# Altium PCB MainDevice.PcbDoc
Units mm, origin at the board's own origin, x right, y up, seen from the top; angles counter-clockwise.
Board outline 77.5 x 66.38 mm, 2 copper layers (Top Layer, Bottom Layer); 108 components, 71 nets, 373 pads, 239 vias.
Unrouted connection lines stored in the file: 12.
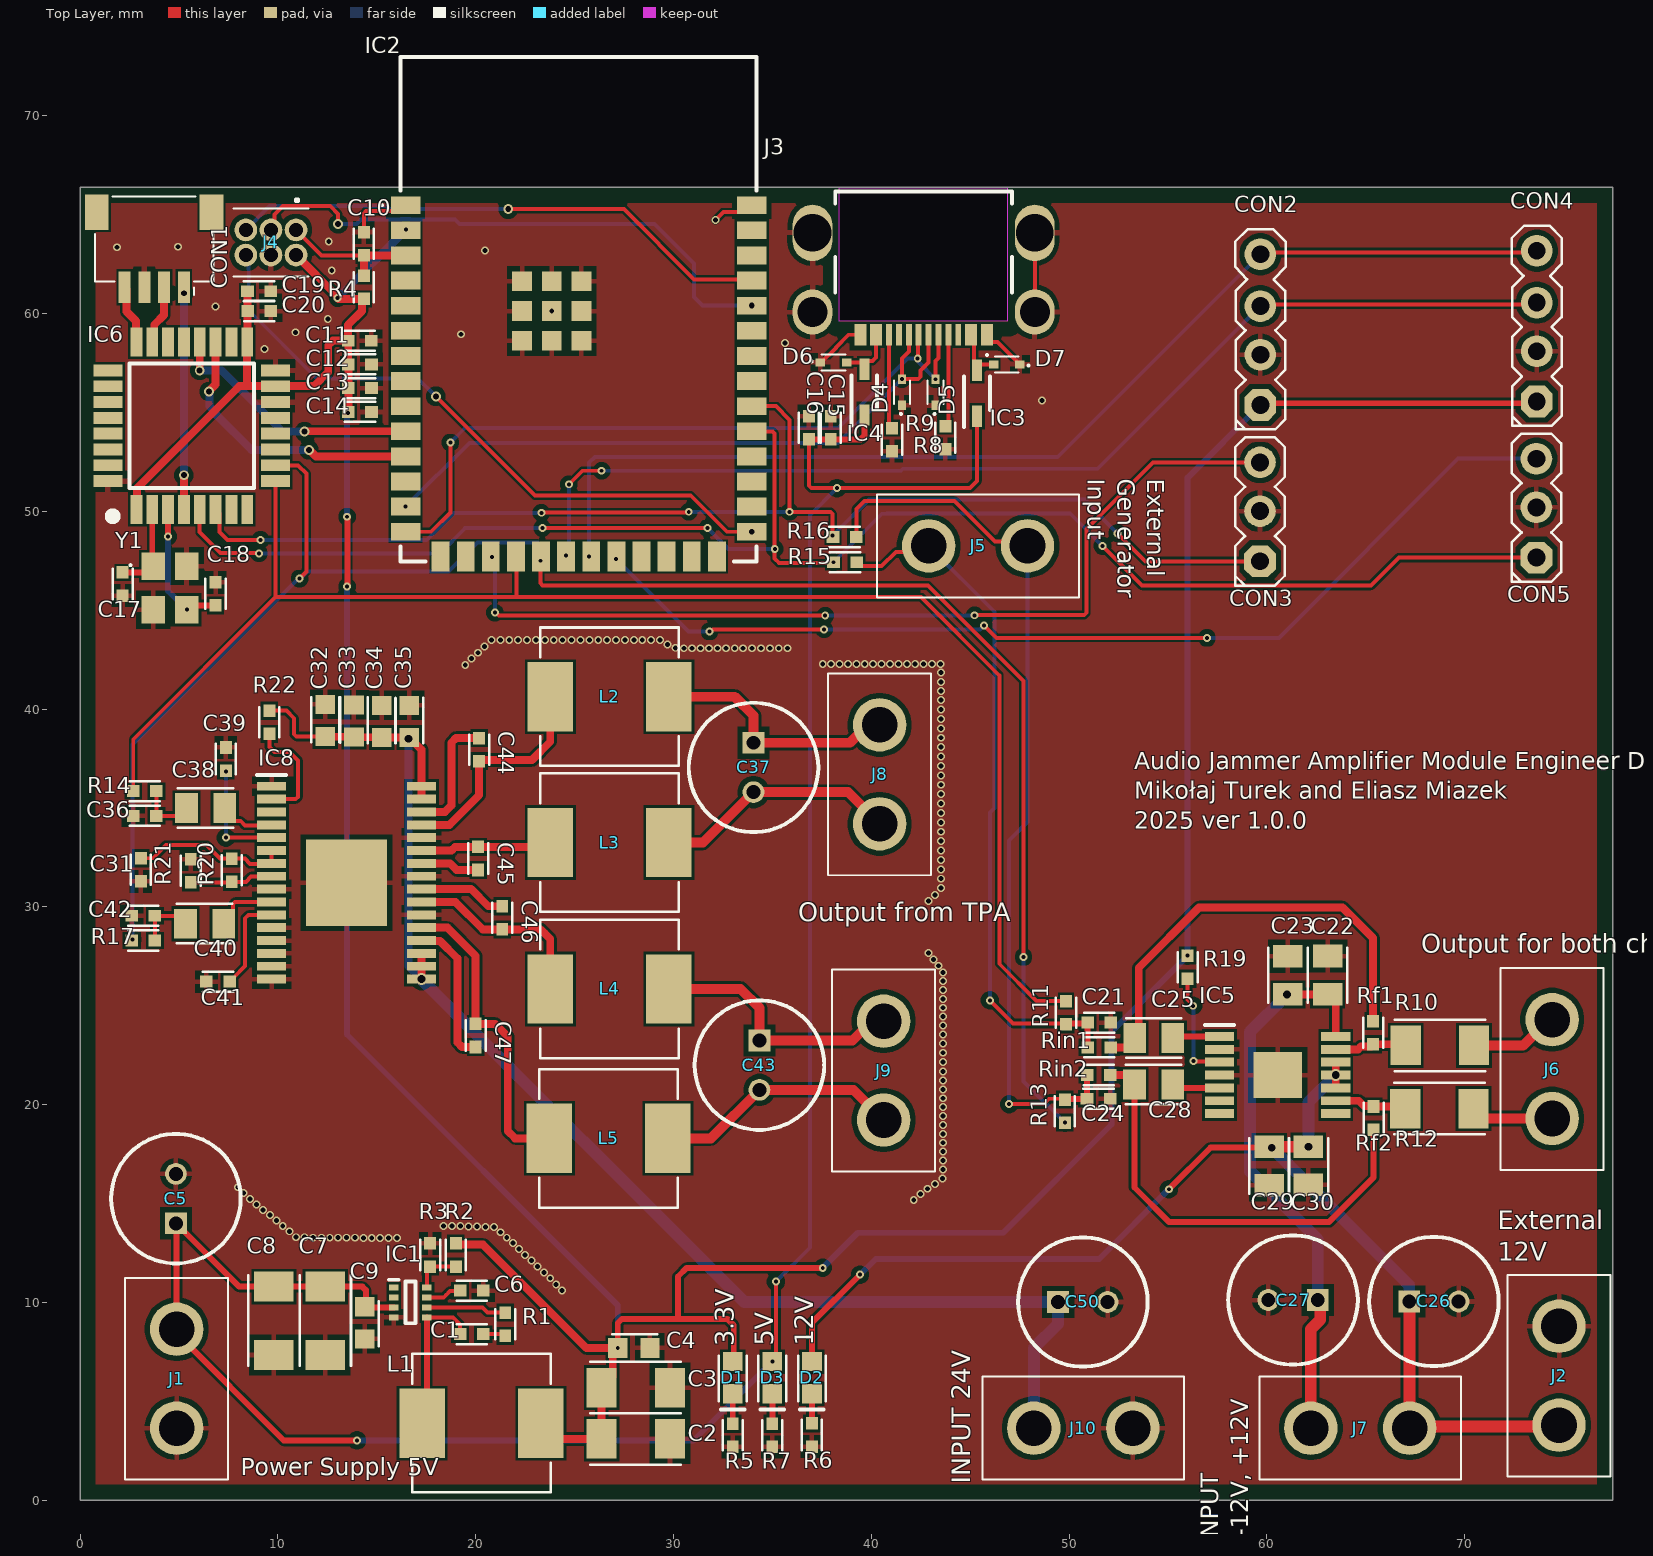
[diagram p0: Top Layer view]
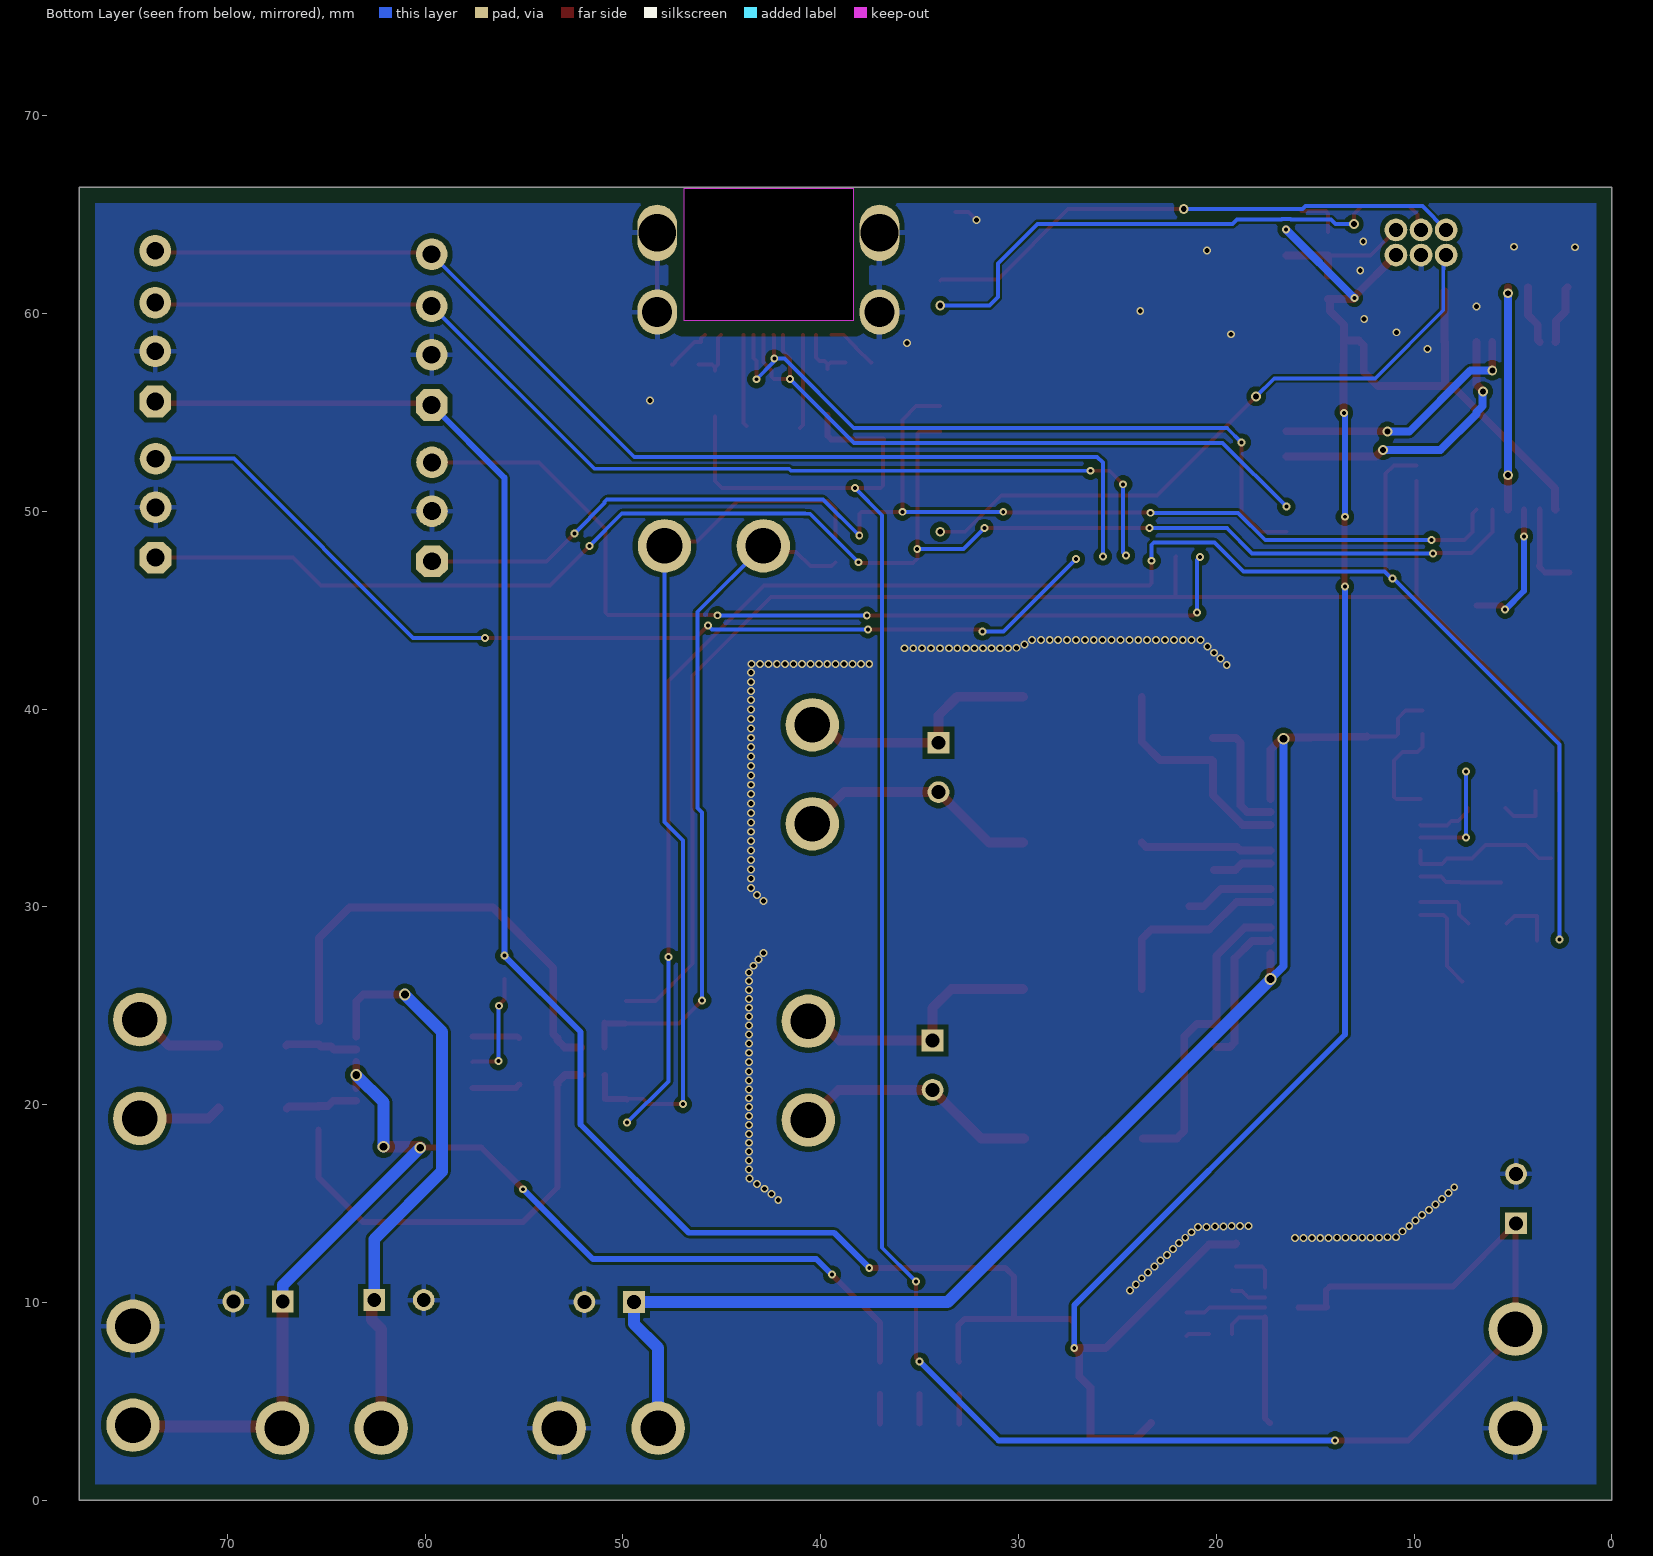
[diagram p1: Bottom Layer view, seen from below]
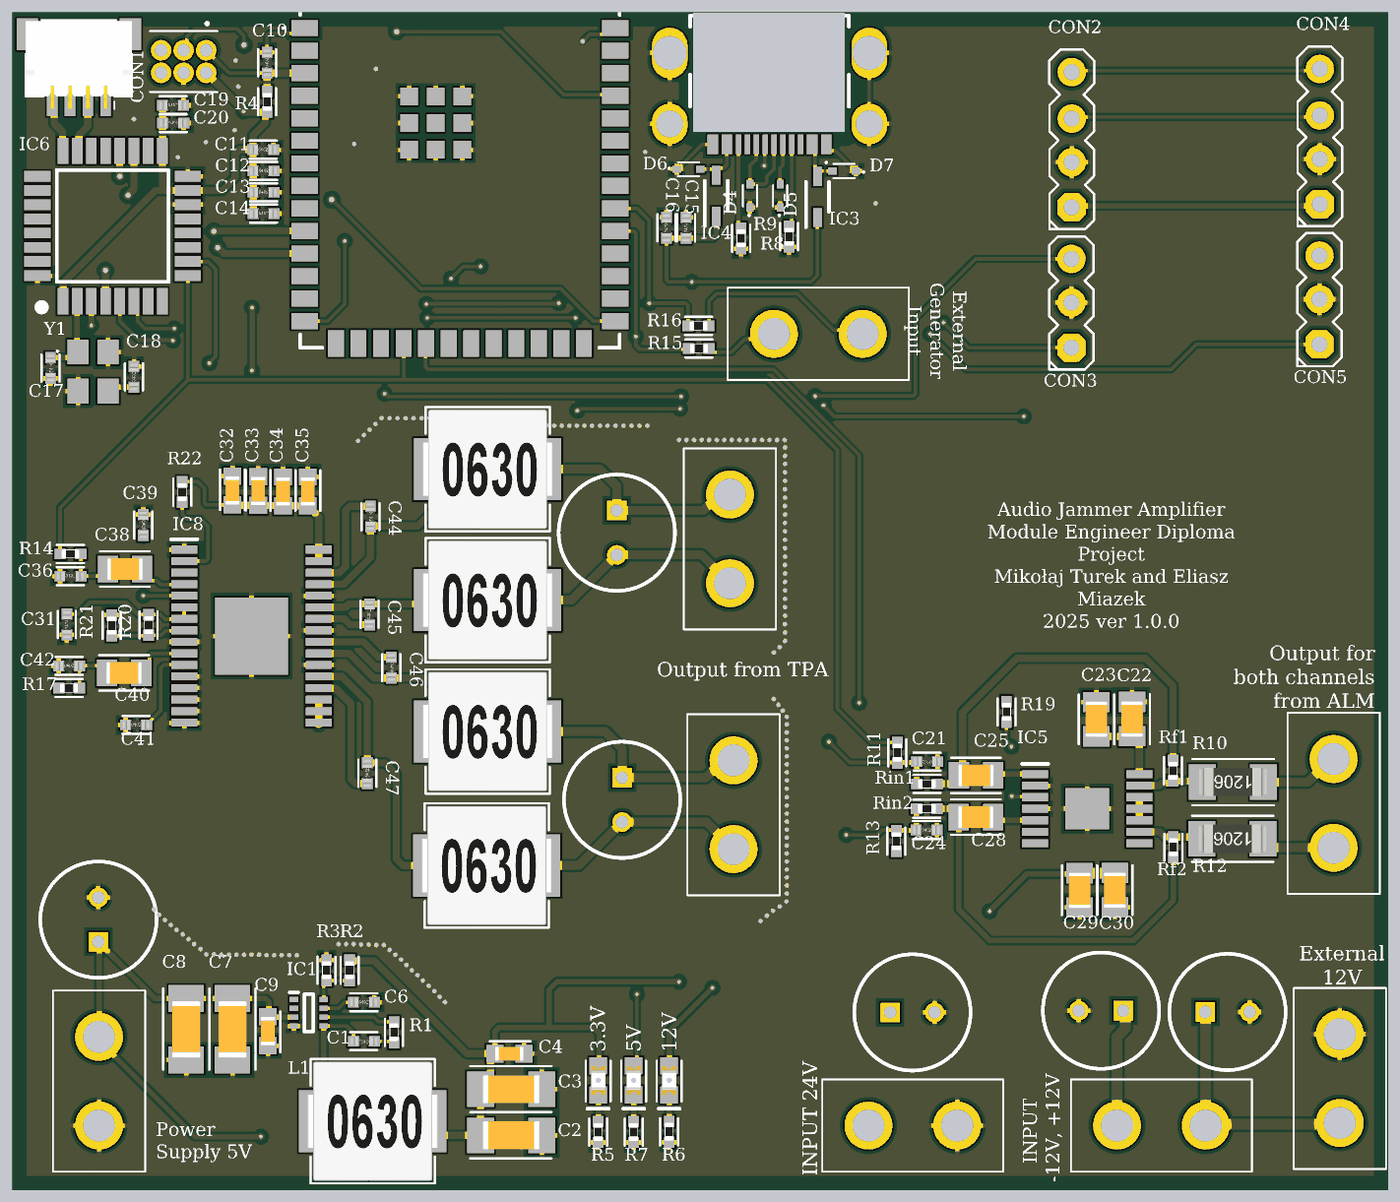
[diagram p2: 3D render of the assembled board from above, using the file's embedded part models]

## Layer stack, top to bottom
Top Solder: solder mask 0.0102, Solder Resist, Dk 3.5
Top Layer: signal copper 0.0356
Dielectric 1: dielectric 0.32, FR-4, Dk 4.8
Bottom Layer: signal copper 0.0356
Bottom Solder: solder mask 0.0102, Solder Resist, Dk 3.5

## Board outline
0,0 77.5,0 77.5,66.375 0,66.375
cut-out: 38.352,66.325 38.352,59.625 46.902,59.625 46.902,66.325

## Design rules (kind name [scope] priority, off if disabled: settings)
BoardOutlineClearance [All] p1: gap=0.8 ignorepadtopadclearanceinfootprint=FALSE
Clearance [All] p1: gap=0.127 ignorepadtopadclearanceinfootprint=TRUE except(0.2: Arc-THPad Track-THPad SMDPad-THPad; 0.254: THPad-Fill THPad-Poly THPad-Region Via-Fill Via-Poly Via-Region; 0.33: Arc-Hole Track-Hole SMDPad-Hole THPad-Hole Via-Hole Fill-Hole Poly-Hole Region-Hole; 0.5: THPad-THPad)
HoleSize [All] p1: absolutevalues=TRUE maxlimit=4 minlimit=0.02 maxpercent=80.000 minpercent=20.000
HoleToHoleClearance [All] p1: gap=0.127 allowstackedmicrovias=TRUE
PlaneClearance [All] p1: clearance=0.3
PlaneConnect PlaneConnect_1 [(HasFootprint('R 2512'))] p1: planeconnectstyle=Relief reliefexpansion=0.508 reliefentries=4 reliefconductorwidth=0.254 reliefairgap=0.254
PlaneConnect [All] p2: planeconnectstyle=Relief reliefexpansion=0.508 reliefentries=4 reliefconductorwidth=0.254 reliefairgap=0.254
PolygonConnect "Polygon Power Connection" [(HasFootprint('DFN 5x6')) OR  (HasFootprint('R 2512')) OR  IsVia OR  HasFootprint('SMD PAD')  OR  (HasFootprint('DJNR60454R5FERROCORE'))  OR  (HasFootprint ('SON50P200X200X80-9N-D')) OR (HasFootprint('SOT230P700X180-4N'))  OR    InNetClass('Power')] p1: connectstyle=Direct reliefconductorwidth=0.254 reliefentries=4 polygonreliefangle="90 Angle" airgapwidth=0.254 // Conection to high power components
PolygonConnect [All] p2: connectstyle=Relief reliefconductorwidth=0.254 reliefentries=4 polygonreliefangle="90 Angle" airgapwidth=0.254
RoutingVias [All] p1: holewidth=0.3 width=0.5 viastyle="Through Hole" minholewidth=0.2 minwidth=0.3 maxholewidth=1 maxwidth=1.27
SilkToSilkClearance [All] p1: silktosilkclearance=0.127
SolderMaskExpansion "Tented Vias" [IsVia] p1: expansion=0.102 istentingtop=TRUE
SolderMaskExpansion [All] p2: expansion=0.102 istentingtop=FALSE
Width [All] p1: maxlimit=1 minlimit=0.127 preferedwidth=0.3 minimp=50.000000 maximp=50.000000 favimp=50.000000
25 further rules are at their usual default settings.

## Classes and differential pairs
component class PowerSupply: C1 C2 C3 C4 C5 C6 C7 C8 C9 C26 C27 C50 IC1 J1 J2 J7 J10 L1 R1 R2 R3
component class MCU: C10 C11 C12 C13 C14 C17 C18 C19 C20 CON1 CON2 CON3 CON4 CON5 D1 D2 D3 IC2 IC6 R4 R5 R6 R7 Y1
component class Interface: C15 C16 D4 D5 D6 D7 IC3 IC4 J3 J4 R8 R9
component class Amplifiers: C21 C22 C23 C24 C25 C28 C29 C30 C31 C32 C33 C34 C35 C36 C37 C38 C39 C40 C41 C42 C43 C44 C45 C46 C47 IC5 IC8 J5 J6 J8 J9 L2 L3 L4 L5 R10 R11 R12 R13 R14 R15 R16 R17 R19 R20 R21 R22 Rf1 Rf2 Rin1 Rin2

## Components (designator, comment, footprint, x,y, rotation, side; value= is the part's Value field where it differs from the comment)
C1 "100nF" "C 0402" 19.8,8.4 r180 top
C2 "40uF" "C 1206" 28.1,3.1 r0 top
C3 "40uF" "C 1206" 28.1,5.7 r0 top
C4 "100nF" "C 0603" 28,7.7 r0 top
C5 "UVY1V101MED1TD" CAPPRD250W50D655H1250 4.85,14 r90 top
C6 "33nF" "C 0402" 19.8,10.6 r0 top
C7 "10uF" "C 1206" 12.4,9.073 r270 top
C8 "10uF" "C 1206" 9.8,9.073 r270 top
C9 "100nF" "C 0603" 14.4,8.973 r270 top
C10 "1uF" "C 0402" 14.352,63.525 r90 top
C11 "1uF" "C 0402" 14.136,58.625 r0 top
C12 "100nF" "C 0402" 14.152,57.425 r0 top
C13 "10uF" "C 0402" 14.152,56.225 r0 top
C14 "22uF" "C 0402" 14.152,55.025 r0 top
C15 "10uF" "C 0402" 37.952,54.225 r90 top
C16 "10uF" "C 0402" 36.852,54.225 r90 top
C17 "22pF" "C 0402" 2.152,46.325 r270 top
C18 "22pF" "C 0402" 6.852,45.825 r90 top
C19 "1uF" "C 0402" 9.052,61.125 r0 top
C20 "100nF" "C 0402" 9.067,60.125 r0 top
C21 "Value" "C 0402" 51.525,24.15 r180 top
C22 "10uF" "C 0805" 63.075,26.55 r90 top
C23 "100nF" "C 0805" 61.065,26.542 r90 top
C24 "Value" "C 0402" 51.493,20.3 r0 top
C25 "10uF" "C 0805" 54.285,23.375 r0 top
C26 "UVY1V101MED1TD" CAPPRD250W50D655H1250 67.2,10.05 r0 top
C27 "UVY1V101MED1TD" CAPPRD250W50D655H1250 62.575,10.125 r180 top
C28 "10uF" "C 0805" 54.275,21.025 r0 top
C29 "10uF" "C 0805" 60.125,16.9 r270 top
C30 "100nF" "C 0805" 62.1,16.915 r270 top
C31 "1uF" "C 0402" 3.075,31.875 r90 top
C32 "1uF" "C 0603" 12.4,39.425 r90 top
C33 "1uF" "C 0603" 13.85,39.4 r90 top
C34 "1uF" "C 0603" 15.25,39.375 r90 top
C35 "1uF" "C 0603" 16.65,39.375 r90 top
C36 "Value" "C 0402" 3.275,34.6 r0 top
C37 "680nF" CAPPRD250W50D655H1250 34.05,38.3 r270 top
C38 "10uF" "C 0805" 6.35,35 r0 top
C39 "10uF" "C 0402" 7.375,37.475 r270 top
C40 "10uF" "C 0805" 6.3,29.15 r0 top
C41 "10uF" "C 0402" 6.975,26.225 r0 top
C42 "Value" "C 0402" 3.2,29.55 r0 top
C43 "680nF" CAPPRD250W50D655H1250 34.35,23.25 r270 top
C44 "220nF" "C 0402" 20.175,37.95 r270 top
C45 "220nF" "C 0402" 20.125,32.45 r90 top
C46 "220nF" "C 0402" 21.35,29.45 r270 top
C47 "220nF" "C 0402" 20,23.5 r90 top
C50 "UVY1V101MED1TD" CAPPRD250W50D655H1250 49.45,10.025 r0 top
CON1 "4 PIN" SM04B-SRSS-TB 3.752,64.125 r0 top
CON2 "4 PIN" "Goldpin 2.54 4P" 59.677,59.185 r90 top
CON3 "3 Pin" "Goldpin 2.54 3P" 59.657,50.011 r90 top
CON4 "4 PIN" "Goldpin 2.54 4P" 73.652,59.36 r90 top
CON5 "3 Pin" "Goldpin 2.54 3P" 73.632,50.198 r90 top
D1 "LED BLUE" "LED 0603 BLUE" 33,6.2 r270 top
D2 "LED BLUE" "LED 0603 BLUE" 37,6.2 r270 top
D3 "LED BLUE" "LED 0603 BLUE" 35,6.2 r270 top
D4 "LESD5D5.0CT1G" LESD5D50CT1G 41.552,56.025 r90 top
D5 "LESD5D5.0CT1G" LESD5D50CT1G 43.252,56.025 r90 top
D6 "LESD5D5.0CT1G" LESD5D50CT1G 38.092,57.525 r0 top
D7 "LESD5D5.0CT1G" LESD5D50CT1G 46.852,57.425 r180 top
IC1 "TPS62933DRLR" SOTFL50P160X60-8N 16.7,10 r0 top
IC2 "ESP32-S3-WROOM-2-N32R16V" ESP32S3WROOM2N32R16V 25.212,60.215 r0 top
IC3 "BAT760-7" SOD2513X120N 45.352,55.963 r90 top
IC4 "BAT760-7" SOD2513X120N 39.652,56.025 r90 top
IC5 "ALM2403QPWPRQ1" SOP65P640X120-15N 60.55,21.5 r0 top
IC6 "STM32G431KBT6" QFP80P900X900X160-32N 5.652,54.325 r90 top
IC8 "TPA3116D2DADR" SOP65P810X120-33N 13.475,31.225 r0 top
J1 "XT30PB" XT30PB 4.885,3.65 r180 top
J2 "XT30PB" XT30PB 74.775,8.8 r0 top
J3 "USB4500-03-0-A" USB4500030A 42.652,62.925 r180 top
J4 "FTSH-103-01-F-D" FTSH-103-XX-YYY-D 10.922,64.225 r180 top
J5 "XT30PB" XT30PB 42.902,48.25 r90 top
J6 "XT30PB" XT30PB 74.425,24.3 r0 top
J7 "XT30PB" XT30PB 62.225,3.65 r90 top
J8 "XT30PB" XT30PB 40.425,39.2 r0 top
J9 "XT30PB" XT30PB 40.625,24.225 r0 top
J10 "XT30PB" XT30PB 53.225,3.65 r270 top
L1 "4.7uH" HPI0630 20.3,3.9 r0 top
L2 "4.7uH" HPI0630 26.775,40.625 r0 top
L3 "4.7uH" HPI0630 26.775,33.25 r0 top
L4 "4.7uH" HPI0630 26.775,25.85 r0 top
L5 "4.7uH" HPI0630 26.725,18.3 r0 top
R1 "0" "R 0402" 21.5,8.9 r90 top
R2 "31.3K" "R 0402" 19,12.4 r270 top
R3 "10K" "R 0402" 17.7,12.4 r270 top
R4 "10k" "R 0402" 14.352,61.325 r270 top
R5 "160" "R 0402" 33,3.284 r90 top
R6 "160" "R 0402" 37,3.3 r90 top
R7 "160" "R 0402" 35,3.284 r90 top
R8 "10k" "R 0402" 43.752,53.725 r90 top
R9 "10k" "R 0402" 41.052,53.625 r90 top
R10 "100R" "R 1206" 68.75,23 r180 top
R11 "Value" "R 0402" 49.85,24.65 r270 top
R12 "100R" "R 1206" 68.725,19.8 r180 top
R13 "Value" "R 0402" 49.793,19.675 r90 top
R14 "Value" "R 0402" 3.275,35.85 r0 top
R15 "0R" "R 0402" 38.677,47.425 r0 top
R16 "0R" "R 0402" 38.652,48.7 r0 top
R17 "Value" "R 0402" 3.2,28.3 r180 top
R19 "10k" "R 0402" 56,26.95 r270 top
R20 "100k" "R 0402" 7.674,31.852 r90 top
R21 "39k" "R 0402" 5.6,31.825 r270 top
R22 "100k" "R 0402" 9.575,39.334 r90 top
Rf1 "Value" "R 0402" 65.375,23.641 r90 top
Rf2 "Value" "R 0402" 65.4,19.325 r270 top
Rin1 "Value" "R 0402" 51.525,22.9 r0 top
Rin2 "Value" "R 0402" 51.509,21.5 r0 top
Y1 "MCSJK-7U-16.00-12-30-80-B-30" MCSJK7U1600123080B30 4.552,46.125 r270 top

## Footprints (in the part's own frame and the unit in brackets; to place one, negate y for a bottom-side part, rotate by r counter-clockwise, add the part's x,y. Pads: shape width x height; smd on the part's side, far side on the other; paste and mask are expansions set on the pad)
"C 0402" [mm] "MLCC Capacitor 0402"
  rect 0.635x0.6 smd: 1(-0.584,0) 2(0.584,0)
  silkscreen extent -0.76,-0.51 0.76,0.51, body extent -0.76,-0.25 0.74,0.25, height 0.35
"C 0603" [mil]
  rect 38x39.37 smd: 1(-32,0) 2(32,0)
  silkscreen extent -43,-28 47,28, body extent -31,-16 31,16, height 24
"C 0805" [mil]
  rect 45x59.06 smd: 1(-38,0) 2(38,0)
  silkscreen extent -55,-39 55,39, body extent -39,-25 39,25, height 49
"C 1206" [mil]
  rect 60x78.74 smd: 1(-68,0) 2(68,0)
  silkscreen extent -91,-51 89,51, body extent -63,-31 63,31, height 59
CAPPRD250W50D655H1250 [mm]
  rect 1.1x1.1 hole 0.7: 1(0,0)
  round 1.1 hole 0.7: 2(2.5,0)
  silkscreen extent -2.02,-3.27 4.52,3.27, body extent -2.15,-3.4 4.65,3.4, height 12.5
ESP32S3WROOM2N32R16V [mm]
  rect 1.5x0.9 smd: 1(-8.75,5.26) 2(-8.75,3.99) 3(-8.75,2.72) 4(-8.75,1.45) 5(-8.75,0.18) 6(-8.75,-1.09) 7(-8.75,-2.36) 8(-8.75,-3.63) 9(-8.75,-4.9) 10(-8.75,-6.17) 11(-8.75,-7.44) 12(-8.75,-8.71) 13(-8.75,-9.98) 14(-8.75,-11.25) 27(8.75,-11.25) 28(8.75,-9.98) 29(8.75,-8.71) 30(8.75,-7.44) 31(8.75,-6.17) 32(8.75,-4.9) 33(8.75,-3.63) 34(8.75,-2.36) 35(8.75,-1.09) 36(8.75,0.18) 37(8.75,1.45) 38(8.75,2.72) 39(8.75,3.99) 40(8.75,5.26)
  rect 0.9x1.5 smd: 15(-6.985,-12.5) 16(-5.715,-12.5) 17(-4.445,-12.5) 18(-3.175,-12.5) 19(-1.905,-12.5) 20(-0.635,-12.5) 21(0.635,-12.5) 22(1.905,-12.5) 23(3.175,-12.5) 24(4.445,-12.5) 25(5.715,-12.5) 26(6.985,-12.5)
  rect 1x1 smd: 41(-1.36,-0.09) 42(-2.86,1.41) 43(-2.86,-0.09) 44(-2.86,-1.59) 45(-1.36,-1.59) 46(0.14,-1.59) 47(0.14,-0.09) 48(0.14,1.41) 49(-1.36,1.41)
  silkscreen extent -10,-12.75 9,12.75, body extent -9,-12.75 9,12.75, height 3.25
FTSH-103-XX-YYY-D [mm]
  round 1.15 hole 0.71: 1(0,0) 2(0,1.27) 3(1.27,0) 4(1.27,1.27) 5(2.54,0) 6(2.54,1.27)
  silkscreen extent -0.64,-1.55 3.17,2.35, body extent -0.66,-1.03 3.15,2.39, height 5.67
"Goldpin 2.54 3P" [mm]
  oct 1.6x1.6 hole 0.9: 1(-2.54,0)
  round 1.6 hole 0.9: 2(0,0) 3(2.46,0)
  silkscreen extent -3.77,-1.25 3.73,1.25
"Goldpin 2.54 4P" [mm]
  oct 1.6x1.6 hole 0.9: 1(-3.81,0)
  round 1.6 hole 0.9: 2(-1.27,0) 3(1.19,0) 4(3.81,0)
  silkscreen extent -5.04,-1.27 5.08,1.27
HPI0630 [mm] "Power Inductor"
  rect 2.3x3.5 smd: 1(-3,0) 2(3,0)
  silkscreen extent -3.5,-3.5 3.5,3.5, body extent -3.65,-3.35 3.65,3.35, height 2.81
"LED 0603 BLUE" [mil]
  rect 38x39.37 smd: 1(-32,0) 2(32,0)
  silkscreen extent -43,-28 63,28, body extent -31,-16 31,16, height 22
LESD5D50CT1G [mm]
  rect 0.48x0.4 smd: 1(-0.66,0) 2(0.66,0)
  silkscreen extent -1.15,-0.4 0.6,0.4, body extent -0.8,-0.4 0.8,0.4, height 0.6
MCSJK7U1600123080B30 [mm]
  rect 1.4x1.2 smd: 1(-1.1,-0.85) 2(1.1,-0.85) 3(1.1,0.85) 4(-1.1,0.85)
  silkscreen extent -1.2,-2.05 -1.1,-1.95, body extent -1.68,-1.33 1.68,1.33, height 0.9
QFP80P900X900X160-32N [mm]
  rect 1.475x0.6 smd: 1(-4.238,2.8) 2(-4.238,2) 3(-4.238,1.2) 4(-4.238,0.4) 5(-4.238,-0.4) 6(-4.238,-1.2) 7(-4.238,-2) 8(-4.238,-2.8) 17(4.238,-2.8) 18(4.238,-2) 19(4.238,-1.2) 20(4.238,-0.4) 21(4.238,0.4) 22(4.238,1.2) 23(4.238,2) 24(4.238,2.8)
  rect 0.6x1.475 smd: 9(-2.8,-4.238) 10(-2,-4.238) 11(-1.2,-4.238) 12(-0.4,-4.238) 13(0.4,-4.238) 14(1.2,-4.238) 15(2,-4.238) 16(2.8,-4.238) 25(2.8,4.238) 26(2,4.238) 27(1.2,4.238) 28(0.4,4.238) 29(-0.4,4.238) 30(-1.2,4.238) 31(-2,4.238) 32(-2.8,4.238)
  silkscreen extent -4.77,-3.15 3.15,4.2, body extent -4.5,-4.5 4.5,4.5, height 1.6
"R 0402" [mm] "0402 resistor Chip"
  rect 0.635x0.6 smd: 1(-0.584,0) 2(0.584,0)
  silkscreen extent -0.76,-0.51 0.76,0.51, body extent -0.5,-0.25 0.5,0.25, height 0.31
"R 1206" [mil]
  rect 60x78.74 smd: 1(-68,0) 2(68,0)
  silkscreen extent -91,-51 89,51, body extent -75,-32 75,31, height 24
SM04B-SRSS-TB [mm]
  rect 0.6x1.6 smd: 1(1.5,-2.8) 2(0.5,-2.8) 3(-0.5,-2.8) 4(-1.5,-2.8)
  rect 1.2x1.8 smd: A(-2.9,1) B(2.9,1)
  silkscreen extent -3,-3.2 3,1.8, body extent -3,-3.2 3,1.75, height 2.9
SOD2513X120N [mm]
  rect 1.075x0.5 smd: 1(-1.162,0) 2(1.162,0)
  silkscreen extent -1.7,-0.65 0.85,0.65, body extent -1.25,-0.65 1.25,0.65, height 1.2
SOP65P640X120-15N [mm]
  rect 1.475x0.45 smd: 1(-2.938,1.95) 2(-2.938,1.3) 3(-2.938,0.65) 4(-2.938,0) 5(-2.938,-0.65) 6(-2.938,-1.3) 7(-2.938,-1.95) 8(2.938,-1.95) 9(2.938,-1.3) 10(2.938,-0.65) 11(2.938,0) 12(2.938,0.65) 13(2.938,1.3) 14(2.938,1.95)
  rect 2.46x2.31 smd: 15(0,0)
  silkscreen extent -3.67,2.52 -2.2,2.52, body extent -3.2,-2.5 3.2,2.5, height 1.13
SOP65P810X120-33N [mm]
  rect 1.475x0.45 smd: 1(-3.788,4.875) 2(-3.788,4.225) 3(-3.788,3.575) 4(-3.788,2.925) 5(-3.788,2.275) 6(-3.788,1.625) 7(-3.788,0.975) 8(-3.788,0.325) 9(-3.788,-0.325) 10(-3.788,-0.975) 11(-3.788,-1.625) 12(-3.788,-2.275) 13(-3.788,-2.925) 14(-3.788,-3.575) 15(-3.788,-4.225) 16(-3.788,-4.875) 17(3.788,-4.875) 18(3.788,-4.225) 19(3.788,-3.575) 20(3.788,-2.925) 21(3.788,-2.275) 22(3.788,-1.625) 23(3.788,-0.975) 24(3.788,-0.325) 25(3.788,0.325) 26(3.788,0.975) 27(3.788,1.625) 28(3.788,2.275) 29(3.788,2.925) 30(3.788,3.575) 31(3.788,4.225) 32(3.788,4.875)
  rect 4.11x4.36 smd: 33(0,0)
  silkscreen extent -4.52,5.45 -3.05,5.45, body extent -4.05,-5.5 4.05,5.5, height 1.2
SOTFL50P160X60-8N [mm]
  rect 0.475x0.3 smd: 1(-0.838,0.75) 2(-0.838,0.25) 3(-0.838,-0.25) 4(-0.838,-0.75) 5(0.838,-0.75) 6(0.838,-0.25) 7(0.838,0.25) 8(0.838,0.75)
  silkscreen extent -1.07,-1.05 0.25,1.15, body extent -0.8,-1.02 0.8,1.08, height 0.6
USB4500030A [mm]
  rect 0.6x1.1 smd: A1(-3.2,4) A4(-2.4,4) A9(2.4,4) A12(3.2,4)
  rect 0.3x1.1 smd: A5(-1.25,4) A6(-0.25,4) A7(0.25,4) A8(1.25,4) B5(1.75,4) B6(0.75,4) B7(-0.75,4) B8(-1.75,4)
  oval 2x2.28 hole 1.52: MH1(-5.62,2.85) MH2(5.62,2.85)
  oval 2x2.85 hole 1.9: MH3(-5.62,-1.15) MH4(5.62,-1.15)
  silkscreen extent -4.47,-3.25 4.47,5.07, body extent -5.78,-2.95 5.78,4.25, height 2.36
XT30PB [mm]
  round 2.7 hole 1.8: 1(0,0) 2(0,-5)
  silkscreen extent -2.6,-7.6 2.6,2.6, body extent -2.6,-7.6 2.6,2.6, height 10.66

## Part data
C1 C2 C3 C4 C6 C7 C8 C9 C10 C11 C12 C13 C14 C15 C16 C17 C18 C19 C20 C21 C22 C23 C24 C25 C28 C29 C30 C31 C32 C33 C34 C35 C36 C38 C39 C40 C41 C42 C44 C45 C46 C47: library part Capacitor, "MLCC Capacitor"
C5 C26 C27 C50: "Capacitor Polarised", Manufacturer_Name=Nichicon, Arrow Part Number=UVY1V101MED1TD, Arrow Price/Stock=https://www.arrow.com/en/products/uvy1v101med1td/nichicon, Datasheet Link=http://nichicon-us.com/english/products/pdfs/e-uvy.pdf, Height=12.5mm, Manufacturer_Part_Number=UVY1V101MED1TD
C37 C43: library part UVY1V101MED1TD, "Capacitor Polarised", Manufacturer_Name=Nichicon, Arrow Part Number=UVY1V101MED1TD, Arrow Price/Stock=https://www.arrow.com/en/products/uvy1v101med1td/nichicon, Datasheet Link=http://nichicon-us.com/english/products/pdfs/e-uvy.pdf, Height=12.5mm, Manufacturer_Part_Number=UVY1V101MED1TD
D4 D5 D6 D7: "TVS Diode (Bi-directional)", Manufacturer_Name=LRC, Height=0.7mm, Manufacturer_Part_Number=LESD5D5.0CT1G
IC1: "Integrated Circuit", Manufacturer_Name="Texas Instruments", Mouser Part Number=595-TPS62933DRLR, Arrow Part Number=TPS62933DRLR, Arrow Price/Stock=https://www.arrow.com/en/products/tps62933drlr/texas-instruments?utm_currency=USD&region=nac, Datasheet Link=https://www.ti.com/lit/ds/symlink/tps62933.pdf?ts=1626073394234, Height=0.6mm, Manufacturer_Part_Number=TPS62933DRLR, Mouser Price/Stock=https://www.mouser.co.uk/ProductDetail/Texas-Instruments/TPS62933DRLR?qs=Rp5uXu7WBW9fv47wfQVntQ%3D%3D
IC2: "Integrated Circuit", Manufacturer_Name="Espressif Systems", Mouser Part Number=356-SP32S3WM2N32R16V, Datasheet Link=https://www.digikey.in/en/products/detail/espressif-systems/ESP32-S3-WROOM-2-N32R16V/25811280, Height=3.25mm, Manufacturer_Part_Number=ESP32-S3-WROOM-2-N32R16V, Mouser Price/Stock=https://www.mouser.co.uk/ProductDetail/Espressif-Systems/ESP32-S3-WROOM-2-N32R16V?qs=%252BHhoWzUJg4Kf%2FwmS40wg%252BQ%3D%3D
IC3 IC4: "Integrated Circuit", Manufacturer_Name="Lattice Semiconductor", Mouser Part Number=N/A, Datasheet Link=https://www.diodes.com/assets/Datasheets/ds30498.pdf, Height=1.2mm, Manufacturer_Part_Number=BAT760-7, Mouser Price/Stock=https://www.mouser.com/Search/Refine.aspx?Keyword=N%2FA
IC5: "Integrated Circuit", Manufacturer_Name="Texas Instruments", Mouser Part Number=595-ALM2403QPWPRQ1, Arrow Part Number=ALM2403QPWPRQ1, Arrow Price/Stock=https://www.arrow.com/en/products/alm2403qpwprq1/texas-instruments?region=nac, Datasheet Link=https://www.ti.com/lit/ds/symlink/alm2403-q1.pdf?ts=1609171403376&ref_url=https%253A%252F%252Fwww.mouser.de%252F, Height=1.2mm, Manufacturer_Part_Number=ALM2403QPWPRQ1, Mouser Price/Stock=https://www.mouser.co.uk/ProductDetail/Texas-Instruments/ALM2403QPWPRQ1?qs=KUoIvG%2F9IlbGB6vKF5Gy0A%3D%3D
IC6: "Integrated Circuit", Manufacturer_Name=STMicroelectronics, Mouser Part Number=511-STM32G431KBT6, Arrow Part Number=STM32G431KBT6, Arrow Price/Stock=https://www.arrow.com/en/products/stm32g431kbt6/stmicroelectronics, Datasheet Link=https://www.st.com/resource/en/datasheet/stm32g431kb.pdf, Height=1.6mm, Manufacturer_Part_Number=STM32G431KBT6, Mouser Price/Stock=https://www.mouser.co.uk/ProductDetail/STMicroelectronics/STM32G431KBT6?qs=T3oQrply3y8teCTeNAFOLg%3D%3D
IC8: "Integrated Circuit", Manufacturer_Name="Texas Instruments", Mouser Part Number=595-TPA3116D2DADR, Arrow Part Number=TPA3116D2DADR, Arrow Price/Stock=https://www.arrow.com/en/products/tpa3116d2dadr/texas-instruments?utm_currency=USD&region=nac, Datasheet Link=http://www.ti.com/lit/gpn/tpa3116d2, Height=1.2mm, Manufacturer_Part_Number=TPA3116D2DADR, Mouser Price/Stock=https://www.mouser.co.uk/ProductDetail/Texas-Instruments/TPA3116D2DADR?qs=3AcK5DacLbpIP1YDOj0hAg%3D%3D
J1 J2 J5 J6 J7 J8 J9 J10: "Connector", Manufacturer_Name=Amass, Datasheet Link=https://www.tme.eu/Document/4acc913878197f8c2e30d4b8cdc47230/XT30UPB%20SPEC.pdf, Height=10.7mm, Manufacturer_Part_Number=XT30PB
J3: "Connector", Manufacturer_Name="GCT (GLOBAL CONNECTOR TECHNOLOGY)", Mouser Part Number=640-USB4500030A, Datasheet Link=https://componentsearchengine.com/Datasheets/2/USB4500-03-0-A.pdf, Manufacturer_Part_Number=USB4500-03-0-A, Mouser Price/Stock=https://www.mouser.co.uk/ProductDetail/GCT/USB4500-03-0-A?qs=7D1LtPJG0i2mVyw7UtV%2FkQ%3D%3D
J4: "Connector", Manufacturer_Name=SAMTEC, Mouser Part Number=200-FTSH10301FD, Arrow Part Number=FTSH-103-01-F-D, Arrow Price/Stock=https://www.arrow.com/en/products/ftsh-103-01-f-d/samtec, Datasheet Link=http://suddendocs.samtec.com/prints/ftsh-1xx-xx-xxx-d-xxx-xx-mkt.pdf, Manufacturer_Part_Number=FTSH-103-01-F-D, Mouser Price/Stock=https://www.mouser.co.uk/ProductDetail/Samtec/FTSH-103-01-F-D?qs=0lQeLiL1qyb7OHmlWV4egA%3D%3D
L1 L2 L3 L4 L5: library part Inductor, "General pourpouse inductor"
R1 R2 R3 R4 R5 R6 R7 R8 R9 R10 R11 R12 R13 R14 R15 R16 R17 R19 R20 R21 R22 Rf1 Rf2 Rin1 Rin2: library part Resistor, "General pourpouse resistor"
Y1: "Crystal or Oscillator", Manufacturer_Name=MULTICOMP, Datasheet Link=https://www.farnell.com/datasheets/2864166.pdf, Height=0.8mm, Manufacturer_Part_Number=MCSJK-7U-16.00-12-30-80-B-30

## Via types
v1: diameter 0.4, hole 0.25, Top Layer to Bottom Layer, tented both sides, 165 vias
v2: diameter 0.4, hole 0.2, Top Layer to Bottom Layer, tented both sides, 57 vias
v3: diameter 0.5, hole 0.3, Top Layer to Bottom Layer, tented both sides, 11 vias
v4: diameter 0.6, hole 0.4, Top Layer to Bottom Layer, tented both sides, 6 vias

## Nets (pads, with @x,y where several pads share a name; then routed paths per layer and width w, separated by ;. In a path a pad name is that pad's centre, name@x,y a point inside that pad or via, vN(x,y) a via of type N, cw(c..) or ccw(c..) an arc to the next point about the centre after c; other vN are vias at no path point)
3.3V: C2.1 C3.1 C4.1 C11.1 C12.1 C13.1 C14.1 C19.1 C20.1 CON2.1 CON4.1 D1.1 IC2.2 IC6.1 IC6.15 IC6.17 J4.2 L1.2 R2.1 R4.2 R19.1 | length 197.6
  Top Layer w0.3: v2(13.5,46.19) 13.513,46.203 13.513,49.713 v2(13.5,49.725) ; C4.1@27.187,7.717 v2(27.187,7.7) 27.187,8.962 27.4,9.175 30.235,9.175 ; D1.1 33.05,7.063 33.05,8.85 32.725,9.175 30.235,9.175 ; v2(37.55,11.75) 30.675,11.75 30.235,11.31 30.235,9.175 ; CON2.1 59.764,55.463 73.564,55.463 CON4.1
  Top Layer w0.4: IC6.1 2.875,50.11 2.875,51.15 8.05,56.325 8.452,56.325 ; C19.1 8.475,61.117 8.475,60.133 C20.1 8.467,60.109 8.467,58.579 IC6.17 8.452,56.325 ; J4.2 13.025,60.852 v2(13.025,60.775) 13.059,60.741 R4.2 14.252,60.641 14.252,60.127 13.552,59.427 C11.1 12.784,58.625 12.55,58.391 12.55,57.05 11.825,56.325 IC6.15 8.452,56.325 ; v2(13.55,54.975) 13.567,54.992 C14.1 C13.1 C12.1 13.559,57.433 C11.1@13.559,58.617 ; IC2.2 16.462,64.237 v2(16.475,64.25) ; R2.1 19.059,12.925 20.375,12.925 25.6,7.7 v2(27.187,7.7) 26.935,7.448 26.935,6.262 C3.1 C2.1 24.1,3.1 L1.2
  Bottom Layer w0.3: v2(13.5,46.19) 13.5,23.55 27.187,9.863 v2(27.187,7.7) ; v2(13.5,49.725) 13.5,54.898 13.55,54.948 v2(13.55,54.975) ; v2(37.55,11.75) 39.325,13.525 46.675,13.525 52.15,19 52.15,23.684 v2(56,27.534) 56,51.698 CON2.1
  Bottom Layer w0.4: v2(13.025,60.775) 13.025,60.8 v2(16.475,64.25)
5V: C5.1 C7.1 C8.1 C9.1 C15.1 C16.1 D3.1 IC1.3 IC3.1 IC4.1 J1.2 | length 116.6
  Top Layer w0.2: v2(35,7.013) 35.184,7.197 v2(35.184,11.051) ; C16.1 36.852,51.292 36.969,51.175 v2(38.275,51.175) 44.984,51.175 45.352,51.542 IC3.1
  Top Layer w0.3: C5.1 C5.1@4.885,13.965 ; v2(14,3.025) 10.3,3.025 4.885,8.44 J1.2 C5.1@4.885,13.965 ; IC1.3 14.436,9.75 C9.1 14.45,9.836 14.45,10.624 14.274,10.8 C7.1 C8.1 8.05,10.8 C5.1@4.885,13.965 ; C16.1 C15.1 39.476,53.641 39.652,53.817 IC4.1
  Bottom Layer w0.2: v2(35.184,11.051) 36.9,12.768 36.9,49.8 v2(38.275,51.175)
  Bottom Layer w0.3: v2(14,3.025) 31.012,3.025 v2(35,7.013)
12V: C26.1 C29.1 C30.1 D2.1 IC5.10 IC5.11 IC5.12 J2.2 J7.2 | length 60.9
  Top Layer w0.3: D2.1 37,8.971 v2(39.434,11.405) ; v2(55.05,15.725) 57.15,17.825 v4(60.25,17.825)
  Top Layer w0.4: IC5.10 v4(63.488,21.5) IC5.12
  Top Layer w0.6: C29.1@60.25,17.873 62.092,17.873 C30.1 v4(62.103,17.875) v4(62.103,17.875) ; C26.1 67.212,10.038 67.212,3.662 J7.2 67.3,3.725 74.7,3.725 J2.2
  Bottom Layer w0.3: v2(39.434,11.405) 40.229,12.2 51.525,12.2 v2(55.05,15.725)
  Bottom Layer w0.6: v4(60.25,17.825) 67.2,10.875 C26.1 ; v4(62.103,17.875) 62.103,20.115 v4(63.488,21.5)
24V: C32.1 C33.1 C34.1 C35.1 C50.1 IC8.17 IC8.18 IC8.19 IC8.31 IC8.32 J10.2 R22.2 | length 71.1
  Top Layer w0.2: R22.2 10.443,39.918 10.825,39.537 10.825,38.729 10.942,38.612 C32.1
  Top Layer w0.4: C32.1 12.412,38.6 13.838,38.6 C33.1 13.863,38.575 15.238,38.575 C34.1 C35.1 ; v4(16.6,38.5) 16.6,38.512 C35.1 ; v4(17.263,26.35) IC8.18 IC8.19 ; IC8.31 IC8.32 17.263,37.949 16.95,38.262 16.95,38.28 16.667,38.562 C35.1
  Bottom Layer w0.4: v4(16.6,38.5) 16.6,27.013 v4(17.263,26.35)
  Bottom Layer w0.6: v4(17.263,26.35) 33.588,10.025 C50.1 49.45,8.925 48.225,7.7 J10.2
-12V: C22.1 C23.1 C27.1 IC5.14 J7.1 | length 28.7
  Top Layer w0.4: C23.1@61.07,25.581 63.071,25.581 C22.1 63.117,25.585 63.488,25.213 IC5.14
  Top Layer w0.6: J7.1 62.225,8.65 62.7,9.125 62.7,10 C27.1
  Bottom Layer w0.6: v4(61.031,25.562) 59.15,23.681 59.15,16.625 62.575,13.2 C27.1
Chanel1: C25.1 Rf1.2 Rin1.2 | length 23.1
  Top Layer w0.4: Rin1.2 52.948,22.9 53.32,23.272 C25.1 53.525,23.58 53.525,26.925 56.575,29.975 63.825,29.975 65.375,28.425 Rf1.2
Chanel2: C28.1 Rf2.2 Rin2.2 | length 22.8
  Top Layer w0.3: C28.1 53.31,15.815 55.05,14.075 63.15,14.075 65.4,16.325 Rf2.2
  Top Layer w0.4: Rin2.2 52.938,21.5 53.31,21.129 C28.1
EN: C10.1 IC2.3 J4.1 R4.1 | length 7.1
  Top Layer w0.2: J4.1 12.206,62.941 C10.1
  Top Layer w0.4: R4.1 C10.1 14.354,62.938 16.459,62.938 IC2.3
FSYNC1: CON5.3 IC2.22 | length 52.2
  Top Layer w0.2: v2(31.825,43.925) 31.879,43.925 31.989,44.034 v2(37.619,44.034) ; v2(45.7,44.225) 46.325,43.6 v2(56.975,43.6)
  Bottom Layer w0.2: v2(27.103,47.579) 30.757,43.925 v2(31.825,43.925) ; v2(37.619,44.034) 45.509,44.034 v2(45.7,44.225) ; v2(56.975,43.6) 60.612,43.6 69.67,52.658 CON5.3
FSYNC2: CON3.3 IC2.17 | length 47.3
  Top Layer w0.2: v2(20.975,44.875) 21.029,44.875 21.179,44.725 v2(37.675,44.725) ; v2(45.23,44.743) 45.242,44.755 50.758,44.755 50.875,44.872 50.875,49.1 54.246,52.471 CON3.3
  Bottom Layer w0.2: v2(20.821,47.692) 20.975,47.538 v2(20.975,44.875) ; v2(37.675,44.725) 37.693,44.743 v2(45.23,44.743)
Gaus1: C21.2 J5.1 R11.2 R15.2 Rin1.1 | length 35.3
  Top Layer w0.2: R15.2 39.461,47.225 40.525,47.225 41.252,47.952 42.603,47.952 J5.1 ; v2(46,25.275) 47.167,24.108 R11.2@49.892,24.108
  Top Layer w0.3: R11.2@49.892,24.108 50.899,24.108 C21.2 Rin1.1
  Bottom Layer w0.2: J5.1 46.23,44.922 46.23,35.002 46,34.772 v2(46,25.275)
Gaus2: C24.1 J5.2 R13.2 R16.2 Rin2.1 | length 45.1
  Top Layer w0.2: R16.2@39.253,48.7 39.253,50.111 39.667,50.525 44.2,50.525 46.252,48.473 47.678,48.473 J5.2 ; v2(46.975,20.025) 48.725,20.025 49,20.3 49.753,20.3 R13.2
  Top Layer w0.3: R13.2 49.814,20.28 50.889,20.28 C24.1 50.917,20.308 50.917,21.492 Rin2.1
  Bottom Layer w0.2: v2(46.975,20.025) 46.975,33.363 47.902,34.29 J5.2
GND: C2.2 C3.2 C4.2 C5.2 C6.2 C7.2 C8.2 C9.2 C10.2 C11.2 C12.2 C13.2 C14.2 C15.2 C16.2 C17.2 C18.2 C19.2 C20.2 C21.1 C22.2 C23.2 C24.2 C26.2 C27.2 C29.2 C30.2 C31.1 C32.2 C33.2 C34.2 C35.2 C36.1 C39.1 C41.1 C42.1 C50.2 CON1.3 CON2.2 CON3.2 CON4.2 CON5.2 D4.1 D5.1 D6.1 D7.1 IC1.4 IC2.1 IC2.40 IC2.41 IC2.42 IC2.43 IC2.44 IC2.45 IC2.46 IC2.47 IC2.48 IC2.49 IC5.2 IC5.4 IC5.15 IC6.14 IC6.16 IC6.32 IC8.1 IC8.9 IC8.12 IC8.13 IC8.14 IC8.15 IC8.16 IC8.22 IC8.25 IC8.28 IC8.33 J1.1 J2.1 J3.A1 J3.A12 J3.MH1 J3.MH2 J3.MH3 J3.MH4 J4.4 J10.1 R3.1 R5.1 R6.1 R7.1 R8.1 R9.1 R21.1 Y1.2 Y1.4 | length 12.6
  Top Layer w0.2: C10.2 14.352,65.058 14.469,65.175 15.702,65.175 ; v1(32.127,64.725) 32.527,65.125 33.202,65.125 ; D6.1 37.472,57.525 38.212,58.265 38.212,58.285 38.852,58.925 J3.A12 ; J3.A1 46.052,58.725 46.052,58.562 46.374,58.562 47.372,57.565 47.372,57.525 47.472,57.425 D7.1 ; J3.MH1 J3.MH3
  other v1: 24.375,10.6 24.075,10.9 23.775,11.225 23.45,11.525 23.125,11.825 22.825,12.125 22.5,12.4 22.2,12.7 21.9,13 14.325,13.25 14.75,13.25 15.175,13.25 15.6,13.25 16.025,13.25 11.775,13.275 12.2,13.275 12.625,13.275 13.05,13.275 13.475,13.275 13.9,13.275 21.575,13.275 10.925,13.3 11.35,13.3 21.25,13.55 10.6,13.6 20.5,13.825 20.925,13.825 19.65,13.85 20.075,13.85 10.25,13.875 18.375,13.875 18.8,13.875 19.225,13.875 9.925,14.15 9.6,14.425 9.25,14.675 8.925,14.95 42.15,15.175 8.6,15.225 42.5,15.475 8.275,15.525 42.85,15.75 7.975,15.825 43.225,16 43.6,16.275 43.625,16.725 43.625,17.175 43.625,17.625 43.625,18.075 43.625,18.525 43.625,18.975 43.625,19.425 43.625,19.875 43.625,20.325 43.625,20.775 43.625,21.225 43.625,21.675 43.625,22.15 43.625,22.625 43.625,23.1 43.625,23.55 43.625,24 43.625,24.45 43.625,24.9 43.625,25.35 43.625,25.8 43.625,26.25 43.625,26.675 43.4,27.025 43.15,27.35 42.9,27.675 42.9,30.3 43.225,30.6 43.525,30.95 43.525,31.425 43.525,31.9 43.525,32.375 43.525,32.85 43.525,33.325 43.525,33.8 43.525,34.275 43.525,34.75 43.525,35.225 43.525,35.7 43.525,36.175 43.525,36.65 43.525,37.125 43.525,37.6 43.525,38.075 43.525,38.55 43.525,39.025 43.525,39.5 43.525,39.975 43.525,40.45 43.525,40.925 43.525,41.375 43.525,41.85 19.475,42.225 37.55,42.275 37.975,42.275 38.4,42.275 38.825,42.275 39.25,42.275 39.675,42.275 40.1,42.275 40.525,42.275 40.95,42.275 41.375,42.275 41.8,42.275 42.225,42.275 42.65,42.275 43.075,42.275 43.5,42.275 19.8,42.55 20.125,42.85 30.525,43.075 30.95,43.075 31.375,43.075 31.8,43.075 32.225,43.075 32.65,43.075 33.1,43.075 33.525,43.075 33.975,43.075 34.425,43.075 34.875,43.075 35.325,43.075 35.775,43.075 30.1,43.1 20.45,43.175 29.7,43.275 20.8,43.5 21.25,43.5 21.7,43.5 22.15,43.5 22.6,43.5 23.05,43.5 23.5,43.5 23.95,43.5 24.4,43.5 24.85,43.5 25.3,43.5 25.75,43.5 26.2,43.5 26.65,43.5 27.1,43.5 27.55,43.5 28,43.5 28.425,43.5 28.875,43.5 29.325,43.5 48.627,55.6 9.327,58.2 35.652,58.5 19.252,58.95 10.902,59.05 12.527,59.725 23.85,60.125 6.852,60.35 12.727,62.175 20.477,63.175 1.877,63.35 4.952,63.375 12.577,63.65
IN1: IC2.18 IC6.9 R11.1 R14.1 | length 77.6
  Top Layer w0.2: R14.1 2.691,38.462 9.89,45.66 ; IC6.9 9.89,45.66 ; IC2.18 22.06,47.691 22.06,45.725 ; R11.1 48.366,25.234 46.475,27.125 46.475,41.7 42.515,45.66 9.89,45.66
IN2: IC2.19 IC6.10 R13.1 R17.2 | length 93.8
  Top Layer w0.2: R17.2 2.616,28.316 v2(2.65,28.35) ; IC6.10 11.025,52.325 11.45,51.9 11.45,46.957 11.1,46.607 v2(11.1,46.6) ; IC2.19 23.307,47.532 v2(23.275,47.5) 23.275,46.367 23.392,46.25 42.875,46.25 47.701,41.424 v2(47.701,27.471)
  Bottom Layer w0.2: v2(2.65,28.35) 2.65,38.2 v2@11.05,46.6 ; v2(11.1,46.6) 11.154,46.6 11.505,46.951 18.626,46.951 20.1,48.425 23.158,48.425 23.275,48.308 v2(23.275,47.5) ; v2(47.701,27.471) 47.701,21.184 v2(49.793,19.091)
IO0: IC2.27 J4.6 | length 32.9
  Top Layer w0.2: v3(17.991,55.808) 22.999,50.8 30.877,50.8 32.712,48.965 v3(33.962,48.965)
  Bottom Layer w0.2: J4.6 8.52,62.816 8.52,62.256 8.53,62.247 8.53,60.164 11.969,56.725 17.074,56.725 v3(17.991,55.808)
NetC1_1: C1.1 R1.1 | length 1.2
  Top Layer w0.2: C1.1 21.416,8.4 R1.1
NetC1_2: C1.2 IC1.5 L1.1 | length 7.8
  Top Layer w0.2: IC1.5 18.85,9.25 19.216,8.884 C1.2
  Top Layer w0.3: L1.1 17.538,4.138 IC1.5
NetC6_1: C6.1 IC1.7 | length 1.8
  Top Layer w0.2: IC1.7 18.383,10.25 18.5,10.367 18.715,10.583 19.198,10.583 C6.1
NetC17_1: C17.1 IC6.2 Y1.1 | length 4.6
  Top Layer w0.3: C17.1 3.386,46.909 Y1.1 3.652,47.275 IC6.2
NetC18_1: C18.1 IC6.3 Y1.3 | length 7
  Top Layer w0.3: v2(4.452,48.725) IC6.3 ; v2(5.402,45.025) 5.617,45.241 C18.1
  Bottom Layer w0.3: v2(4.452,48.725) 4.452,45.975 v2(5.402,45.025)
NetC25_2: C25.2 IC5.1 | length 2.4
  Top Layer w0.3: C25.2 55.325,23.45 IC5.1
NetC28_2: C28.2 IC5.5 | length 2.4
  Top Layer w0.3: C28.2 55.415,20.85 IC5.5
NetC31_2: C31.2 IC8.6 IC8.7 R20.2 | length 7.9
  Top Layer w0.2: C31.2 3.684,32.459 4.35,33.125 6.4,33.125 7.088,32.437 R20.2 8.338,32.437 8.6,32.175 9.662,32.175 IC8.7 IC8.6
NetC36_2: C36.2 C38.1 R14.2 | length 2.9
  Top Layer w0.2: R14.2 C36.2 4.985,34.6 C38.1
NetC37_1: C37.1 J8.1 L2.2 | length 12.8
  Top Layer w0.5: L2.2 33.1,40.625 34.05,39.675 C37.1 38.93,38.3 39.83,39.2 J8.1
NetC37_2: C37.2 J8.2 L3.2 | length 12.4
  Top Layer w0.5: L3.2 31.5,33.25 C37.2 38.825,35.8 J8.2
NetC38_2: C38.2 IC8.4 | length 2.8
  Top Layer w0.2: C38.2 7.315,34.822 7.787,34.35 8.125,34.35 8.35,34.125 9.662,34.125 IC8.4
NetC39_2: C39.2 IC8.5 | length 5.7
  Top Layer w0.2: v2(7.375,33.5) IC8.5 ; v2(7.375,36.85) C39.2
  Bottom Layer w0.2: v2(7.375,33.5) v2(7.375,36.85)
NetC40_1: C40.1 C42.2 R17.1 | length 3
  Top Layer w0.2: R17.1 C42.2 4.935,29.55 C40.1
NetC40_2: C40.2 IC8.10 | length 3.2
  Top Layer w0.2: C40.2 7.725,29.61 7.725,30.133 7.842,30.25 IC8.10
NetC41_2: C41.2 IC8.11 | length 4.9
  Top Layer w0.2: C41.2 7.577,26.225 7.777,26.425 7.777,26.442 8.35,27.016 8.35,29.425 8.525,29.6 IC8.11
NetC43_1: C43.1 J9.1 L4.2 | length 13.3
  Top Layer w0.5: L4.2 33.4,25.85 34.35,24.9 C43.1 39.055,23.25 40.03,24.225 J9.1
NetC43_2: C43.2 J9.2 L5.2 | length 12.5
  Top Layer w0.5: L5.2 31.9,18.3 C43.2 39.1,20.75 J9.2
NetC44_1: C44.1 IC8.30 | length 6.3
  Top Layer w0.4: IC8.30 18.446,34.8 18.775,35.129 18.775,38.3 19.009,38.534 C44.1
NetC44_2: C44.2 IC8.29 L2.1 | length 11.5
  Top Layer w0.4: IC8.29 18.675,34.15 20.175,35.65 C44.2 20.234,37.425 22.85,37.425 23.775,38.35 L2.1
NetC45_1: C45.1 IC8.26 | length 3
  Top Layer w0.4: IC8.26 18.708,32.2 19.042,31.866 C45.1
NetC45_2: C45.2 IC8.27 L3.1 | length 6.7
  Top Layer w0.4: IC8.27 18.783,32.85 18.967,33.034 C45.2 23.559,33.034 L3.1
NetC46_1: C46.1 IC8.24 | length 4.4
  Top Layer w0.4: IC8.24 19.775,30.9 20.641,30.034 C46.1
NetC46_2: C46.2 IC8.23 L4.1 | length 9.8
  Top Layer w0.4: IC8.23 18.975,30.25 20.359,28.866 C46.2 23.284,28.866 23.499,28.651 23.775,28.375 L4.1
NetC47_1: C47.1 IC8.20 | length 7.5
  Top Layer w0.4: IC8.20 17.288,28.275 18.205,28.275 19.075,27.405 19.075,23.154 19.314,22.916 C47.1
NetC47_2: C47.2 IC8.21 L5.1 | length 15.7
  Top Layer w0.4: IC8.21 18.575,28.95 20,27.525 C47.2 20.991,24.084 21.625,23.45 21.625,18.675 22,18.3 L5.1
NetCON3_1: CON3.1 IC2.32 IC6.6 R16.1 | length 64.7
  Top Layer w0.2: IC6.6 7.052,49.887 7.052,48.948 7.45,48.55 v2(9.125,48.55) ; v2(23.325,49.925) 23.35,49.95 30.75,49.95 v2(30.775,49.975) ; IC2.32 35.185,55.315 35.875,54.625 v2(35.875,49.975) 37.937,49.975 38.055,49.858 v2(38.055,48.768) ; v2(52.452,48.886) 53.867,47.471 CON3.1
  Bottom Layer w0.2: v2(9.125,48.55) 17.53,48.55 18.905,49.925 v2(23.325,49.925) ; v2(30.775,49.975) v2(35.875,49.975) ; v2(38.055,48.768) 39.887,50.6 50.808,50.6 50.925,50.483 50.925,50.414 v2(52.452,48.886)
NetCON5_1: CON5.1 IC2.31 IC6.5 R15.1 | length 80.9
  Top Layer w0.2: IC6.5 6.052,48.948 7.1,47.9 9.019,47.9 v2(9.047,47.873) ; v2(23.375,49.15) v2(31.725,49.15) ; IC2.31 35.003,54.045 35.12,53.928 35.12,47.605 35.35,47.375 38.042,47.375 v2(38.092,47.425) ; v2(51.7,48.25) 53.7,46.25 65.267,46.25 66.675,47.658 CON5.1
  Bottom Layer w0.2: v2(9.047,47.873) 18.198,47.873 19.475,49.15 v2(23.375,49.15) ; v2(31.725,49.15) 32.775,48.1 v2(35.125,48.1) ; v2(38.092,47.425) 40.542,49.875 40.775,49.875 40.8,49.9 50.05,49.9 v2(51.7,48.25)
NetD1_2: D1.2 R5.2 | length 1.5
  Top Layer w0.3: R5.2 D1.2
NetD2_2: D2.2 R6.2 | length 1.5
  Top Layer w0.3: R6.2 D2.2
NetD3_2: D3.2 R7.2 | length 1.5
  Top Layer w0.3: R7.2 D3.2
NetD4_2: D4.2 IC2.13 J3.A6 J3.B6 | length 33.4
  Top Layer w0.2: J3.B6 41.902,58.075 41.552,57.725 v2(41.552,56.685) 42.373,56.685 42.491,56.802 42.491,57.114 42.902,57.525 J3.A6
  Bottom Layer w0.2: v2(16.462,50.235) 19.687,53.46 38.327,53.46 v2(41.552,56.685)
NetD5_2: D5.2 IC2.14 J3.A7 J3.B7 | length 36.6
  Top Layer w0.2: IC2.14 17.74,48.965 18.725,49.95 v2(18.725,53.475) ; v2(42.352,57.725) 42.377,57.75 42.377,58.9 J3.A7 ; v2(43.253,56.676) 43.253,57.601 43.402,57.749 J3.B7
  Bottom Layer w0.2: v2(18.725,53.475) 19.45,54.2 38.317,54.2 41.842,57.725 v2(42.352,57.725) 42.39,57.687 42.39,57.539 v2(43.253,56.676) 43.253,56.724 v2@43.252,56.725
NetD6_2: D6.2 IC4.2 J3.A9 | length 3.3
  Top Layer w0.2: D6.2 39.502,57.525 39.652,57.375 IC4.2 39.652,57.443 39.802,57.593 40.057,57.593 40.252,57.787 J3.A9
NetD7_2: D7.2 IC3.2 J3.A4 | length 2.8
  Top Layer w0.2: J3.A4 45.202,58.775 45.202,57.425 IC3.2@45.352,57.275 ; IC3.2 IC3.2@45.352,57.275 ; D7.2 45.502,57.425 IC3.2@45.352,57.275
NetIC1_6: IC1.6 R1.2 | length 4.1
  Top Layer w0.2: IC1.6 20.35,9.75 20.6,9.5 21.484,9.5 R1.2
NetIC1_8: IC1.8 R2.2 R3.2 | length 2.4
  Top Layer w0.2: IC1.8 17.538,11.654 R3.2 R2.2
NetIC5_3: IC5.3 R19.2 | length 5.6
  Top Layer w0.2: R19.2 56,25.329 56.275,25.054 v2(56.275,25) ; v2(56.3,22.2) 56.325,22.175 57.587,22.175 IC5.3
  Bottom Layer w0.2: v2(56.275,25) 56.287,24.988 56.287,22.212 v2(56.3,22.2)
NetIC5_9: IC5.9 R12.2 Rf2.1 | length 3.7
  Top Layer w0.4: IC5.9 64.65,20.2 64.925,19.925 65.384,19.925 Rf2.1 66.889,19.909 R12.2
NetIC5_13: IC5.13 R10.2 Rf1.1 | length 3.7
  Top Layer w0.4: IC5.13 64.625,22.8 64.764,22.939 65.275,22.939 65.375,23.039 Rf1.1 66.966,23.057 R10.2
NetIC8_2: IC8.2 R22.1 | length 5.6
  Top Layer w0.2: R22.1 9.575,38.075 9.825,37.825 10.6,37.825 11.025,37.4 11.025,35.567 10.908,35.45 IC8.2
NetIC8_8: IC8.8 R20.1 R21.2 | length 4.2
  Top Layer w0.2: R21.2 7.646,31.241 R20.1 8.383,31.268 8.649,31.534 9.671,31.534 IC8.8
NetJ3_A5: J3.A5 R8.2 | length 4.7
  Top Layer w0.2: R8.2 43.902,54.459 J3.A5
NetJ3_B5: J3.B5 R9.2 | length 4.8
  Top Layer w0.2: J3.B5 40.902,54.359 R9.2
NetJ6_1: J6.1 R10.1 | length 4.5
  Top Layer w0.5: R10.1 72.967,23 74.267,24.3 J6.1
NetJ6_2: J6.2 R12.1 | length 4.2
  Top Layer w0.5: R12.1 70.952,19.3 J6.2
RESET: CON1.1 IC6.4 | length 11.2
  Top Layer w0.4: IC6.4 v3(5.252,51.825) ; v3(5.252,61.025) CON1.1
  Bottom Layer w0.4: v3(5.252,51.825) v3(5.252,61.025)
RXD0: IC2.37 J4.5 | length 27.6
  Top Layer w0.2: v3(21.652,65.275) 27.502,65.275 31.052,61.725 33.902,61.725 IC2.37
  Bottom Layer w0.2: J4.5 9.582,65.425 15.501,65.425 15.651,65.275 v3(21.652,65.275)
SCLK: CON2.4 CON4.4 IC2.21 | length 57.1
  Top Layer w0.2: CON2.4 59.764,63.083 73.564,63.083 CON4.4
  Bottom Layer w0.2: v2(25.739,47.717) 25.739,52.458 26.031,52.75 49.432,52.75 CON2.4
SDATA: CON2.3 CON4.3 IC2.20 | length 56.4
  Top Layer w0.2: v2(24.715,51.366) 25.399,52.05 v2(26.375,52.05) ; CON2.3 59.764,60.463 73.564,60.463 CON4.3
  Bottom Layer w0.2: v2(24.575,47.775) 24.715,47.915 v2(24.715,51.366) ; v2(26.375,52.05) 41.5,52.05 41.6,52.15 51.452,52.15 CON2.3
SWCLK: CON1.4 IC6.24 | length 3
  Top Layer w0.4: CON1.4 2.352,61.225 2.352,60.098 2.825,59.625 2.825,58.59 IC6.24
SWDIO: CON1.2 IC6.23 | length 3
  Top Layer w0.4: IC6.23 3.752,58.663 3.752,59.425 4.252,59.925 CON1.2
TXD0: IC2.36 J4.3 | length 28.7
  Top Layer w0.2: J4.3 9.833,64.407 9.833,65.007 10.252,65.425 12.652,65.425 13.052,65.025 v3(13.052,64.525)
  Bottom Layer w0.2: v3(13.052,64.525) 13.985,64.525 14.215,64.755 16.23,64.755 16.255,64.78 16.695,64.78 16.72,64.755 18.951,64.755 19.181,64.525 29.052,64.525 31.052,62.525 31.052,60.825 31.482,60.395 v3(33.962,60.395)
USART1_RX: IC2.10 IC6.20 | length 13.1
  Top Layer w0.4: v3(6.052,57.125) IC6.20 ; v3(11.352,54.025) 11.372,54.045 IC2.10
  Bottom Layer w0.4: v3(6.052,57.125) 7.152,57.125 10.252,54.025 v3(11.352,54.025)
USART1_TX: IC2.11 IC6.19 | length 14.4
  Top Layer w0.4: v3(6.521,56.056) 6.521,56.083 6.852,56.414 IC6.19 ; v3(11.575,53.1) 11.602,53.1 11.927,52.775 IC2.11
  Bottom Layer w0.4: v3(6.521,56.056) 6.54,56.037 6.54,55.318 6.852,55.006 6.852,54.925 8.677,53.1 v3(11.575,53.1)
pads on no net: CON1.A CON1.B IC1.1 IC1.2 IC2.4 IC2.5 IC2.6 IC2.7 IC2.8 IC2.9 IC2.12 IC2.15 IC2.16 IC2.23 IC2.24 IC2.25 IC2.26 IC2.28 IC2.29 IC2.30 IC2.33 IC2.34 IC2.35 IC2.38 IC2.39 IC5.6 IC5.7 IC5.8 IC6.7 IC6.8 IC6.11 IC6.12 IC6.13 IC6.18 IC6.21 IC6.22 IC6.25 IC6.26 IC6.27 IC6.28 IC6.29 IC6.30 IC6.31 IC8.3 J3.A8 J3.B8

## Polygon pours and split planes (outlines as drawn)
GND on Top Layer "GND_L01_P000" (solid, pour order 0): 0,0 77.475,0 77.5,0.025 77.5,66.375 0,66.375
GND on Bottom Layer "GND_L02_P001" (solid, pour order 1): 0,0 77.5,0 77.5,66.375 0,66.375

## Silkscreen, mask and mechanical layers (free items; w line width, h text height)
Top Overlay:
  text "External / Generator / Input" at 50.65,51.649 h1.5 r270
  text "Audio Jammer Amplifier Module Engineer Diploma Project / Mikołaj Turek and Eliasz Miazek / 2025 ver 1.0.0" at 53.3,33.654 h1.5
  text "Output from TPA" at 36.3,28.95 h1.6
  text "Output for both channels from ALM" at 67.8,27.35 h1.6
  text "External / 12V" at 71.676,11.775 h1.6
  text "3.3V" at 33.386,7.8 h1.6 r90
  text "5V" at 35.386,7.801 h1.6 r90
  text "12V" at 37.4,7.801 h1.6 r90
  text "Power Supply 5V" at 8.125,0.95 h1.5
  text "INPUT 24V" at 45.325,0.825 h1.6 r90
  text "INPUT /  -12V, +12V" at 59.375,-2.24 h1.52 r90
Mechanical 1:
  lines w1.2: 0,0 0,66.375 77.5,66.375 77.5,0 0,0 ; 0,0 0,50 38.35,50 38.35,43.3 46.95,43.3 46.95,50 50,50 50,0 0,0 ; 38.352,59.625 46.902,59.625 46.902,66.325 38.352,66.325 38.352,59.625